# EAGLE board rcp2fpc_v5 (EAGLE 9.6.2)
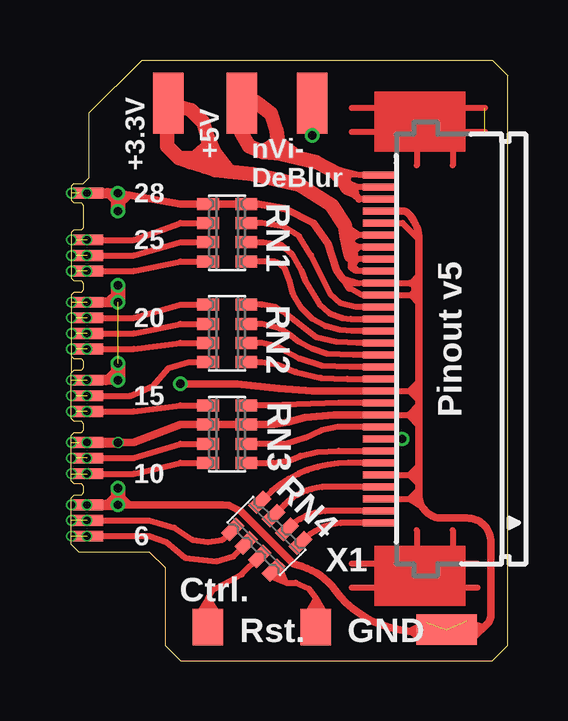
[diagram p0: board, top side]
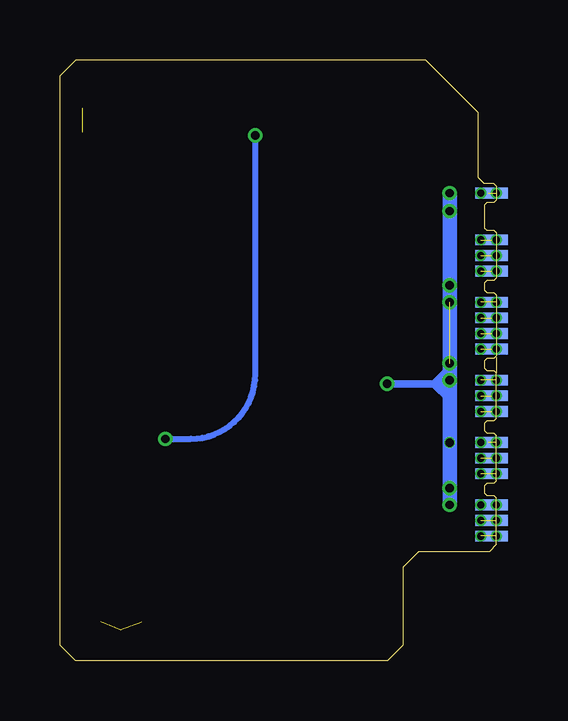
[diagram p1: board, bottom side, seen from below]

Size 18.2 x 25.05 mm. Coordinates in mm from the lower left corner, seen from the top.
Outline: 0,12 0.1,12.1 0.4,12.1 0.5,12.2 0.5,12.5 0.4,12.6 0.1,12.6 0,12.7 0,15.25 0.1,15.35 0.4,15.35 0.5,15.45 0.5,15.75 0.4,15.85 0.1,15.85 0,15.95 0,17.85 0.1,17.95 0.4,17.95 0.5,18.05 0.5,19 0.4,19.1 0.1,19.1 0,19.2 0,19.8 0.1,19.9 0.5,19.9 0.75,20.15 0.75,22.85 2.95,25.05 17.55,25.05 18.2,24.4 18.2,0.65 17.55,0 4.55,0 3.9,0.65 3.9,3.9 3.25,4.55 0.3,4.55 0,4.85 0,6.8 0.1,6.9 0.4,6.9 0.5,7 0.5,7.3 0.4,7.4 0.1,7.4 0,7.5 0,9.4 0.1,9.5 0.4,9.5 0.5,9.6 0.5,9.9 0.4,10 0.1,10 0,10.1 0,12
Outline: 0,12.65 0,12
Copper layers (1*16): Top 0.018mm / dielectric 1.55mm / Bottom 0.018mm
Design rules "Multi-CB_2L_100um-Tracks_OL35um *": minimum track width 0.1mm, minimum drill 0.3mm, track to track 6mil, track to pad 6mil, pad to pad 6mil, via to via 6mil, smd to smd 0mil, copper to edge 0.2mm, drill to drill 0.2mm, minimum pad ring 0.125mm, minimum via ring 0.02mm, stop-mask expansion 2mil, vias tented up to drill 0.45mm, thermal gap 0.2mm

## Footprints (pad centres in the part's own frame; a part is rotated, then mirrored left to right if it is on the bottom)
SMD1,27-2,54 = smd 1.27 x 2.54: 1 0,0
CTS742C083 = smd 0.5 x 0.9: 1 -1.2,-0.8; 2 -0.4,-0.8; 3 0.4,-0.8; 4 1.2,-0.8; 5 1.2,0.8; 6 0.4,0.8; 7 -0.4,0.8; 8 -1.2,0.8
SMD0.8SQ = smd 1.27 x 1.524: P$1 0,0
SMD0,45-1,35 = smd 1.35 x 0.45: P$1 0,0
FH12-30S-0.5SH = smd 0.3 x 1.3: 1 -7.25,3.25; 2 -6.75,3.25; 3 -6.25,3.25; 4 -5.75,3.25; 5 -5.25,3.25; 6 -4.75,3.25; 7 -4.25,3.25; 8 -3.75,3.25; 9 -3.25,3.25; 10 -2.75,3.25; 11 -2.25,3.25; 12 -1.75,3.25; 13 -1.25,3.25; 14 -0.75,3.25; 15 -0.25,3.25; 16 0.25,3.25; 17 0.75,3.25; 18 1.25,3.25; 19 1.75,3.25; 20 2.25,3.25; 21 2.75,3.25; 22 3.25,3.25; 23 3.75,3.25; 24 4.25,3.25; 25 4.75,3.25; 26 5.25,3.25; 27 5.75,3.25; 28 6.25,3.25; 29 6.75,3.25; 30 7.25,3.25

## Placement (x,y rotation side)
+3.3V  [SMD1,27-2,54]  4.05,23.25 180 top
+5V  [SMD1,27-2,54]  7.1,23.25 180 top
E$1  [CTS742C083]  8.14,5.2 135 top
E$2  [SMD0.8SQ]  5.7,1.4 0 top
E$3  [CTS742C083]  6.5,17.85 270 top
E$4  [CTS742C083]  6.5,13.65 270 top
E$5  [CTS742C083]  6.5,9.45 270 top
E$6  [SMD0.8SQ]  10.2,1.4 0 top
E$8  [SMD0,45-1,35]  0.65,8.45 0 top
E$9  [SMD0,45-1,35]  0.65,9.1 0 top
E$10  [SMD0,45-1,35]  0.65,10.4 0 top
E$11  [SMD0,45-1,35]  0.65,11.05 0 top
E$12  [SMD0,45-1,35]  0.65,11.7 0 top
E$13  [SMD0,45-1,35]  0.65,13 0 top
E$14  [SMD0,45-1,35]  0.65,13.65 0 top
E$15  [SMD0,45-1,35]  0.65,14.3 0 top
E$16  [SMD0,45-1,35]  0.65,14.95 0 top
E$17  [SMD0,45-1,35]  0.65,16.25 0 top
E$18  [SMD0,45-1,35]  0.65,16.9 0 top
E$19  [SMD0,45-1,35]  0.65,17.55 0 top
E$20  [FH12-30S-0.5SH]  16.05,13 90 top
E$22  [SMD0,45-1,35]  0.2,17.55 0 bottom
E$23  [SMD0,45-1,35]  0.2,16.9 0 bottom
E$24  [SMD0,45-1,35]  0.2,16.25 0 bottom
E$25  [SMD0,45-1,35]  0.2,14.95 0 bottom
E$26  [SMD0,45-1,35]  0.2,14.3 0 bottom
E$27  [SMD0,45-1,35]  0.2,13.65 0 bottom
E$28  [SMD0,45-1,35]  0.2,13 0 bottom
E$29  [SMD0,45-1,35]  0.2,11.7 0 bottom
E$30  [SMD0,45-1,35]  0.2,11.05 0 bottom
E$31  [SMD0,45-1,35]  0.2,10.4 0 bottom
E$32  [SMD0,45-1,35]  0.2,9.1 0 bottom
E$33  [SMD0,45-1,35]  0.2,8.45 0 bottom
E$38  [SMD0,45-1,35]  0.65,7.8 0 top
E$40  [SMD0,45-1,35]  0.65,5.85 0 top
E$41  [SMD0,45-1,35]  0.65,5.2 0 top
E$42  [SMD0,45-1,35]  0.2,7.8 0 bottom
E$43  [SMD0,45-1,35]  0.2,6.5 0 bottom
E$44  [SMD0,45-1,35]  0.2,5.85 0 bottom
E$45  [SMD0,45-1,35]  0.2,5.2 0 bottom
E$46  [SMD0,45-1,35]  0.65,19.5 0 top
E$47  [SMD0,45-1,35]  0.2,19.5 0 bottom
GND  [SMD0,45-1,35]  0.65,6.5 0 top
GND_P  [SMD1,27-2,54]  15.65,1.3 90 top
NVIDB  [SMD1,27-2,54]  10.05,23.25 180 top

## Library data of the parts
+3.3V +5V E$2 E$6 E$8-E$19 E$22-E$33 E$38 E$40-E$47 GND GND_P NVIDB = wirepad
E$1 E$3-E$5 = resistor-net
E$20 = con-hirose

## Nets
3V3: +3.3V.1 E$20.22 E$20.23 E$20.24 E$20.25
#DSYNC: E$5.1 E$10.P$1 E$31.P$1
#DSYNC.1: E$5.8 E$20.11
+5V: +5V.1 E$20.28 E$20.29 E$20.30
CTRL: E$1.7 E$2.P$1
CTRL.1: E$1.2 E$20.2
D0: E$3.2 E$19.P$1 E$22.P$1
D0.1: E$3.7 E$20.19
D1: E$3.3 E$18.P$1 E$23.P$1
D1.1: E$3.6 E$20.18
D2: E$3.4 E$17.P$1 E$24.P$1
D2.1: E$3.5 E$20.17
D3: E$4.1 E$15.P$1 E$26.P$1
D3.1: E$4.8 E$20.16
D4: E$4.2 E$14.P$1 E$27.P$1
D4.1: E$4.7 E$20.15
D5: E$4.3 E$13.P$1 E$28.P$1
D5.1: E$4.6 E$20.14
D6: E$4.4 E$11.P$1 E$30.P$1
D6.1: E$4.5 E$20.13
GND: E$3.1 E$3.8 E$5.2 E$5.7 E$9.P$1 E$12.P$1 E$16.P$1 E$20.3 E$20.5 E$20.10 E$20.12 E$20.20 E$20.21 E$20.26 E$20.27 E$25.P$1 E$29.P$1 E$32.P$1 E$46.P$1 GND_P.1
LRCLK: E$5.4 E$38.P$1
LRCLK.1: E$5.5 E$20.7
NVIDB: E$20.8 NVIDB.1
RST: E$1.8 E$6.P$1
RST.1: E$1.1 E$20.1
SCLK: E$1.6 E$41.P$1
SCLK.1: E$1.3 E$20.4
SDATA: E$1.5 E$40.P$1
SDATA.1: E$1.4 E$20.6
VCLK: E$5.3 E$8.P$1 E$33.P$1
VCLK.1: E$5.6 E$20.9

## Tracks (layer width: path | path; a pad name or v marks a point on that pad's centre or on a via)
3V3
  Top 0.254: 11.72,16.35 11.85,16.25 11.95,16.25 | E$20.22 11.95,16.25 | 11.72,16.35 11.65,16.4 11.65,16.55 | 11.87,16.68 11.72,16.35 | 11.65,16.85 11.66,16.75 12,16.75 | E$20.23 12,16.75 | 12,16.75 11.87,16.68 | 11.65,16.55 11.87,16.68 | 11.65,16.55 11.95,16.25 | E$20.24 12.04,17.25 | 12.04,17.25 12,17.25 | 11.65,16.9 11.65,16.55 | 11.65,16.9 12,16.75 | 11.65,16.9 12,17.25 | 12,17.25 11.58,17.26 | 12.04,17.25 11.5,17.45 12,17.75 | E$20.25 12,17.75 | 12,17.75 11.48,17.76 | 12,17.75 11.4,18.15
  Top 0.61: 11.65,16.9 11.58,17.26 11.48,17.76 11.4,18.15 10.85,19 9.5,19.85 8.38,20.11 7.55,20.3 6.58,20.39 | 6.58,20.39 6,20.45 5.55,20.6 | 5.55,20.6 4.95,20.8 | 4.5,20.95 4.95,20.8 | 4.5,20.95 4,21.45 4,21.95 +3.3V.1 5,22.95 5.5,22.45 5.7,21.8 | 5.7,21.8 5.95,21.2 | 5.95,21.2 6.58,20.39 | 5.55,20.6 5.78,20.95 | 5.78,20.95 5.95,21.2 | 5.7,21.8 5.73,21.46 | 5.73,21.46 5.78,20.95 | 4.95,20.8 5.78,20.95 | 4.95,20.8 5.73,21.46 | 5.78,20.95 4.5,20.95
#DSYNC  (via drill 0.3 pad 0.45)  (1 unrouted)
  Top 0.254: E$10.P$1 2.6,10.4 4.55,10.65 E$5.1
  other vias: 0.65,10.4
#DSYNC1  (via drill 0.3 pad 0.45)
  other vias: 0,10.4
#DSYNC.1
  Top 0.254: E$5.8 8.2,10.65 11.15,10.75 E$20.11
+5V
  Top 0.254: 10.59,20.59 10.92,20.52 11.99,20.25 | E$20.30 12.05,20.25 11.99,20.25 | E$20.28 12,19.25 | 11.87,19.38 11.45,19.55 | 11.99,20.25 11.6,20.27 | 11.5,19.95 11.6,20.27 | 11.85,19.75 11.5,19.75 | E$20.29 12,19.75 | 12,19.75 11.85,19.75 | 11.85,19.75 11.9,19.35 10.96,20.16 | 10.96,20.16 12,19.75 | 11.6,20.27 11.15,20.3 | 10.96,20.16 10.2,20.8
  Top 0.305: 11.5,19.75 11.87,19.38 11.9,19.35 12,19.25
  Top 0.508: 7.7,23.3 7.15,23.3 +5V.1
  Top 0.61: 11.5,19.75 11.15,20.3 10.2,20.8 9.5,20.96 | +5V.1 7.1,22 7.41,21.46 8,21.2 | 8,21.2 8.7,21.15 | 9.5,20.96 8.7,21.15 | 8.7,21.15 8.62,21.63 | 8.62,21.63 8.55,22.1 8.33,22.82 7.7,23.3 | 8,21.2 8.62,21.63 | 9.5,20.96 8.62,21.63
A_LRCLK  (via drill 0.3 pad 0.45)  (1 unrouted)
  other vias: 0.65,7.8 0,7.8
A_SCLK  (via drill 0.3 pad 0.45)  (1 unrouted)
  other vias: 0.65,5.2 0,5.2
A_SDATA  (via drill 0.3 pad 0.45)  (1 unrouted)
  other vias: 0,5.85 0.65,5.85
CTRL
  Top 0.254: E$2.P$1 5.7,2.6 | 5.7,2.6 5.2,1.8 | 5.7,2.6 6.2,1.8 | 5.7,2.6 5.9,2.95 7.1,3.6 E$1.7
CTRL.1
  Top 0.254: E$20.2 10.81,6.25 arc45 9.02,5.51 E$1.2
D0  (via drill 0.3 pad 0.45)  (1 unrouted)
  Top 0.254: E$19.P$1 2.6,17.55 4.55,18.25 E$3.2
  other vias: 0.65,17.55
D0.1
  Top 0.254: E$3.7 7.95,18.25 8.85,18.1 9.5,17.7 10,16.9 10.8,15.3 11.25,14.9 11.85,14.75 E$20.19
D1  (via drill 0.3 pad 0.45)  (1 unrouted)
  Top 0.254: E$18.P$1 2.6,16.9 4.55,17.45 E$3.3
  other vias: 0.65,16.9
D1.1
  Top 0.254: E$3.6 8,17.45 8.75,17.35 9.2,16.95 9.6,16.25 9.75,15.85 10.35,14.85 10.75,14.5 11.3,14.3 11.65,14.25 E$20.18
D2  (via drill 0.3 pad 0.45)  (1 unrouted)
  Top 0.254: E$17.P$1 2.6,16.25 4.55,16.65 E$3.4
  other vias: 0.65,16.25
D2.1
  Top 0.254: E$20.17 11.7,13.75 11.2,13.8 10.6,13.95 10.05,14.25 9.6,14.7 9.25,15.3 9.1,15.85 8.9,16.35 8.7,16.55 8.45,16.65 E$3.5
D3  (via drill 0.3 pad 0.45)  (1 unrouted)
  Top 0.254: E$15.P$1 2.6,14.3 4.55,14.85 E$4.1
  other vias: 0.65,14.3
D3.1
  Top 0.254: E$4.8 7.95,14.85 8.5,14.75 8.98,14.43 10.21,13.49 11.04,13.29 12,13.25 | E$20.16 12,13.25 | 12,13.25 11.9,13.25
D4  (via drill 0.3 pad 0.45)  (1 unrouted)
  Top 0.254: E$14.P$1 2.6,13.65 4.55,14.05 E$4.2
  other vias: 0.65,13.65
D4.1
  Top 0.254: E$4.7 7.95,14.05 8.7,13.85 9.1,13.6 9.5,13.3 10.05,13 10.65,12.8 11.75,12.75 E$20.15
D5  (via drill 0.3 pad 0.45)  (1 unrouted)
  Top 0.254: E$13.P$1 2.6,13 4.55,13.25 E$4.3
  other vias: 0.65,13
D5.1
  Top 0.254: E$4.6 7.95,13.25 8.6,13.1 8.95,12.9 9.5,12.6 10.45,12.3 11.6,12.25 E$20.14
D6  (via drill 0.3 pad 0.45)  (1 unrouted)
  Top 0.254: E$11.P$1 2.45,11.05 3.4,11.45 4.05,12.2 4.9,12.45 E$4.4
  other vias: 0.65,11.05
D6.1
  Top 0.254: E$4.5 7.95,12.45 8.6,12.35 9.35,12.05 10.4,11.8 11.5,11.75 E$20.13
D7  (via drill 0.3 pad 0.45)
  other vias: 0,11.05
D8  (via drill 0.3 pad 0.45)
  other vias: 0,13
D9  (via drill 0.3 pad 0.45)
  other vias: 0,13.65
D10  (via drill 0.3 pad 0.45)
  other vias: 0,14.3
D11  (via drill 0.3 pad 0.45)
  other vias: 0,16.9
D12  (via drill 0.3 pad 0.45)
  other vias: 0,16.25
D13  (via drill 0.3 pad 0.45)
  other vias: 0,17.55
GND  (via drill 0.3 pad 0.45, 0.35, 0.35 pad 0.6)  (10 unrouted)
  Top 0.254: v0.65,6.5 v0,6.5 | 0.33,9.1 E$9.P$1 | E$46.P$1 0.33,19.5 | 11.6,15.55 12.1,15.25 E$20.20 14.15,15.25 | 12,15.74 E$20.21 14.1,15.75 | 12,15.74 11.47,15.73 | 12,15.74 11.31,15.94 | E$20.3 14.1,6.75 | 14.1,6.75 14.35,6.75 14.5,6.9 | E$20.5 14.1,7.75 | 14.1,7.75 14.5,7.75 | E$20.10 14.05,10.25 | 14.05,10.25 14.5,10.25 | E$20.12 14.1,11.25 | 14.15,15.25 14.5,15.25 | 14.1,15.75 14.5,15.75 | E$20.26 13.81,18.25 14.5,17.56 | 14.15,15.75 14.12,15.72 14.1,15.75 | 14.15,15.75 14.5,16.1 | 14.15,15.75 14.3,15.6 | 14.43,15.52 14.3,15.65 14.3,15.6 | 14.43,15.52 14.5,15.45 | 14.3,15.4 14.43,15.52 | 14.15,15.25 14.3,15.4 | 14.3,15.4 14.3,15.6 | 14.15,15.25 14.5,14.9 | 14.5,11.25 14.1,11.25 | 14.1,11.25 14.5,11.65 | 14.1,11.25 14.5,10.85 | 14.05,10.25 14.5,10.7 | 14.05,10.25 14.5,9.8 | 14.1,7.75 14.5,8.15 | 14.1,7.75 14.5,7.35 | 14.1,6.75 14.5,7.15 | 14.1,6.75 14.65,6.4 | 14.8,1.6 14.1,1.25 14.65,0.85 | 16.5,1.65 17.25,1.4 16.65,0.85
  Top 0.305: v1.95,9.1 2.6,9.1 4.55,9.85 E$5.2 E$5.7 8.45,9.85 9.05,9.95 9.75,10.15 10.95,10.25 E$20.10 | v1.95,19.5 2.4,19.42 | 2.4,19.42 4.55,19.05 E$3.1 E$3.8 7.8,19.05 8.9,18.85 10.1,18.25 10.7,17.4 11.05,16.3 11.31,15.94 11.47,15.73 11.6,15.55 | v4.55,11.55 6.92,11.55 8.65,11.35 10.05,11.25 E$20.12 | v1.95,6.5 2.4,6.5 | 2.4,6.5 6.3,6.5 6.57,6.48 7.08,6.23 9.27,4.03 9.62,3.93 arc-38 11,2.95 arc35 12.95,1.49 arc31 GND_P.1 16.85,1.3 arc90 17.5,1.95 17.5,4.95 arc90 16.5,5.95 15.45,5.95 arc-90 14.5,6.9 14.5,7.15 14.5,7.35 14.5,7.75 14.5,8.15 14.5,9.8 14.5,10.25 14.5,10.7 14.5,10.85 14.5,11.25 14.5,11.65 14.5,14.9 14.5,15.25 14.5,15.45 14.5,15.75 14.5,16.1 14.5,17.56 arc45 14.05,18.65 arc45 13.81,18.75 E$20.27 | 2.4,19.42 1.95,18.97 v1.95,18.75 1.95,19.05 1.5,19.5 | 1.5,14.95 1.95,15.4 v1.95,15.65 | v1.95,12.4 1.95,12.2 1.45,11.7 | 1.45,6.5 1.95,7 v1.95,7.2 1.95,6.95 2.4,6.5
  Top 0.406: E$16.P$1 1.5,14.95 v1.95,14.95 | v0.65,6.5 1.45,6.5 v1.95,6.5 | v1.95,11.7 1.45,11.7 E$12.P$1 | E$46.P$1 1.5,19.5 v1.95,19.5 | E$9.P$1 v1.95,9.1
  Top 0.61: v1.95,7.2 v1.95,6.5 | v1.95,12.4 v1.95,11.7 | v1.95,15.65 v1.95,14.95 | v1.95,19.5 v1.95,18.75
  Bottom 0.305: v4.55,11.55 2.6,11.55 | 2.6,11.55 1.95,11.55 | 2.6,11.55 1.95,12.2 | 2.6,11.55 1.95,10.9
  Bottom 0.61: v1.95,6.5 1.95,10.9 1.95,11.55 1.95,12.2 v1.95,14.95 v1.95,19.5
  other vias: 0.65,14.95 0.65,11.7 0.65,9.1 0,19.5 0.65,19.5 0,14.95 0,11.7 0,9.1
LRCLK
  Top 0.254: E$38.P$1 2.6,7.8 4.55,8.25 E$5.4
LRCLK.1
  Top 0.254: E$5.5 8.42,8.25 9.1,8.35 9.55,8.55 10.25,8.7 11.15,8.75 E$20.7
NVIDB  (via drill 0.35 pad 0.6)
  Top 0.254: E$20.8 v13.8,9.25 | NVIDB.1 v10.05,21.9
  Bottom 0.254: v13.8,9.25 12.75,9.25 arc-90 10.05,11.95 v10.05,21.9
RST
  Top 0.254: 10.2,2.6 E$6.P$1 | 10.2,2.6 10.7,1.75 | 10.2,2.6 9.7,1.75 | E$1.8 8.95,3.25 | 8.95,3.25 9.35,3.25 9.9,3 10.2,2.6 | 8.95,3.25 8.25,3.55 | 8.95,3.25 8.65,3.95
RST.1
  Top 0.254: E$1.1 9.65,5.01 arc-45 11.45,5.75 E$20.1
S$1
  Top 0.254: 15.9,5.45 15.9,2.65
S$2
  Top 0.254: 16.95,4.05 11.7,4.05
S$3
  Top 0.254: 15.9,23.45 15.9,20.65
S$4  (1 unrouted)
  Top 0.254: 17.25,23.05 11.7,23.05 | 17.25,22.05 11.7,22.05
S$6
  Top 0.254: 14.4,23.45 14.4,20.65
S$7
  Top 0.254: 14.4,5.45 14.4,2.65
S$8
  Top 0.254: 16.95,3.05 11.7,3.05
SCLK
  Top 0.254: E$1.6 6.75,4.35 6.05,4.15 4.75,4.3 3.95,4.95 3.25,5.2 E$41.P$1
SCLK.1
  Top 0.254: E$20.4 11,7.25 10.95,7.25 10.68,7.25 arc45 8.89,6.51 E$1.3
SDATA
  Top 0.254: E$40.P$1 3.25,5.85 4.3,5.55 5.05,5.05 5.7,4.95 6.3,5.05 E$1.5
SDATA.1
  Top 0.254: E$20.6 11.55,8.25 arc45 8.05,6.8 E$1.4
VCLK  (via drill 0.3 pad 0.45)  (1 unrouted)
  Top 0.254: E$8.P$1 2.6,8.45 4.55,9.05 E$5.3
  other vias: 0.65,8.45
VCLK1  (via drill 0.3 pad 0.45)
  other vias: 0,8.45
VCLK.1
  Top 0.254: E$5.6 8.95,9.05 9.75,9.3 10.4,9.6 11.1,9.75 E$20.9

## Text on the board
tPlace: 28 | nVi- / DeBlur | RN1 | 25 | RN2 | 20 | 15 | RN3 | Pinout v5 | 10 | RN4 | 6 | X1 | Ctrl. | Rst. | GND